# Altium PCB playA.PcbDoc
Units mm, origin at the board's own origin, x right, y up, seen from the top; angles counter-clockwise.
Board outline 50 x 50 mm, 2 copper layers (Top Layer, Bottom Layer); 7 components, 4 nets, 7 pads, 0 vias.
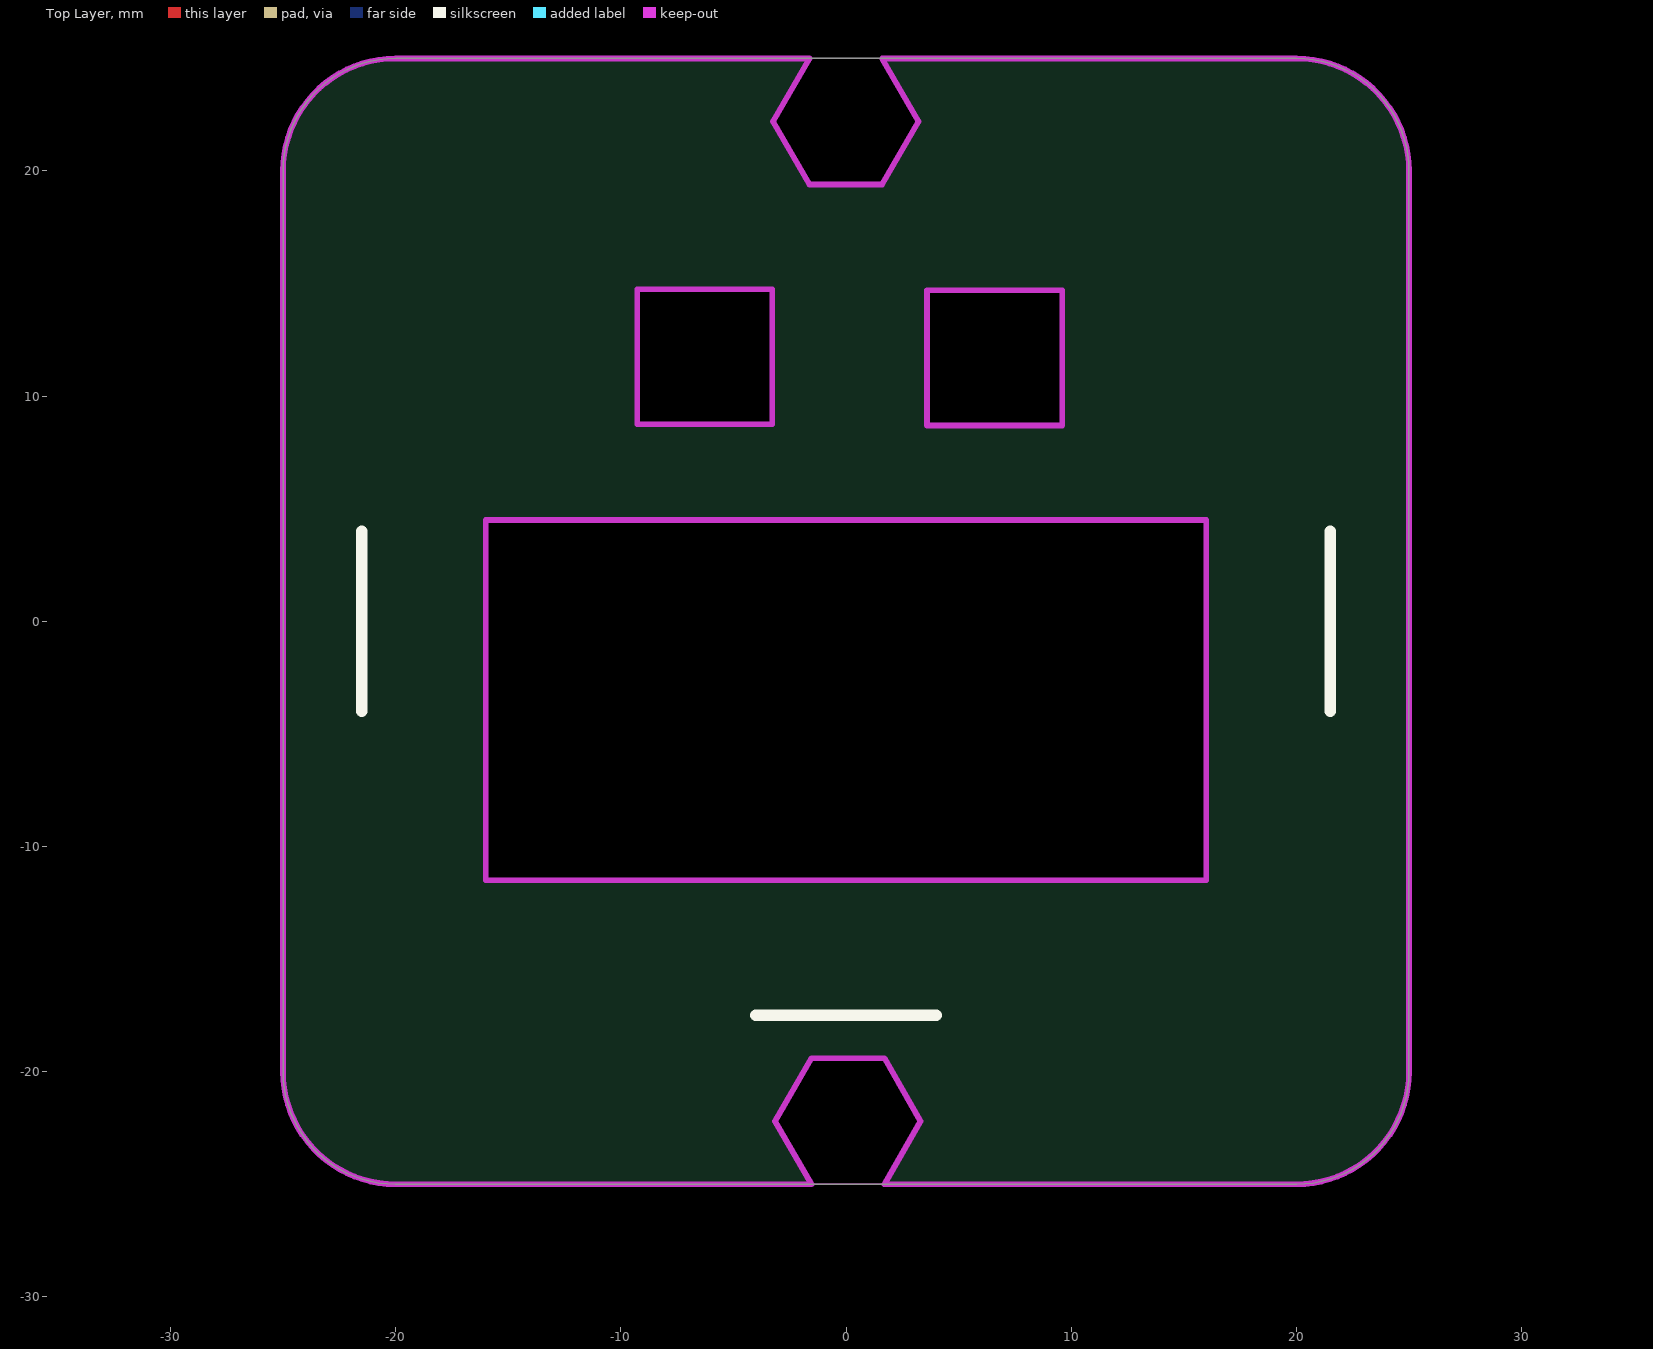
[diagram p0: Top Layer view]
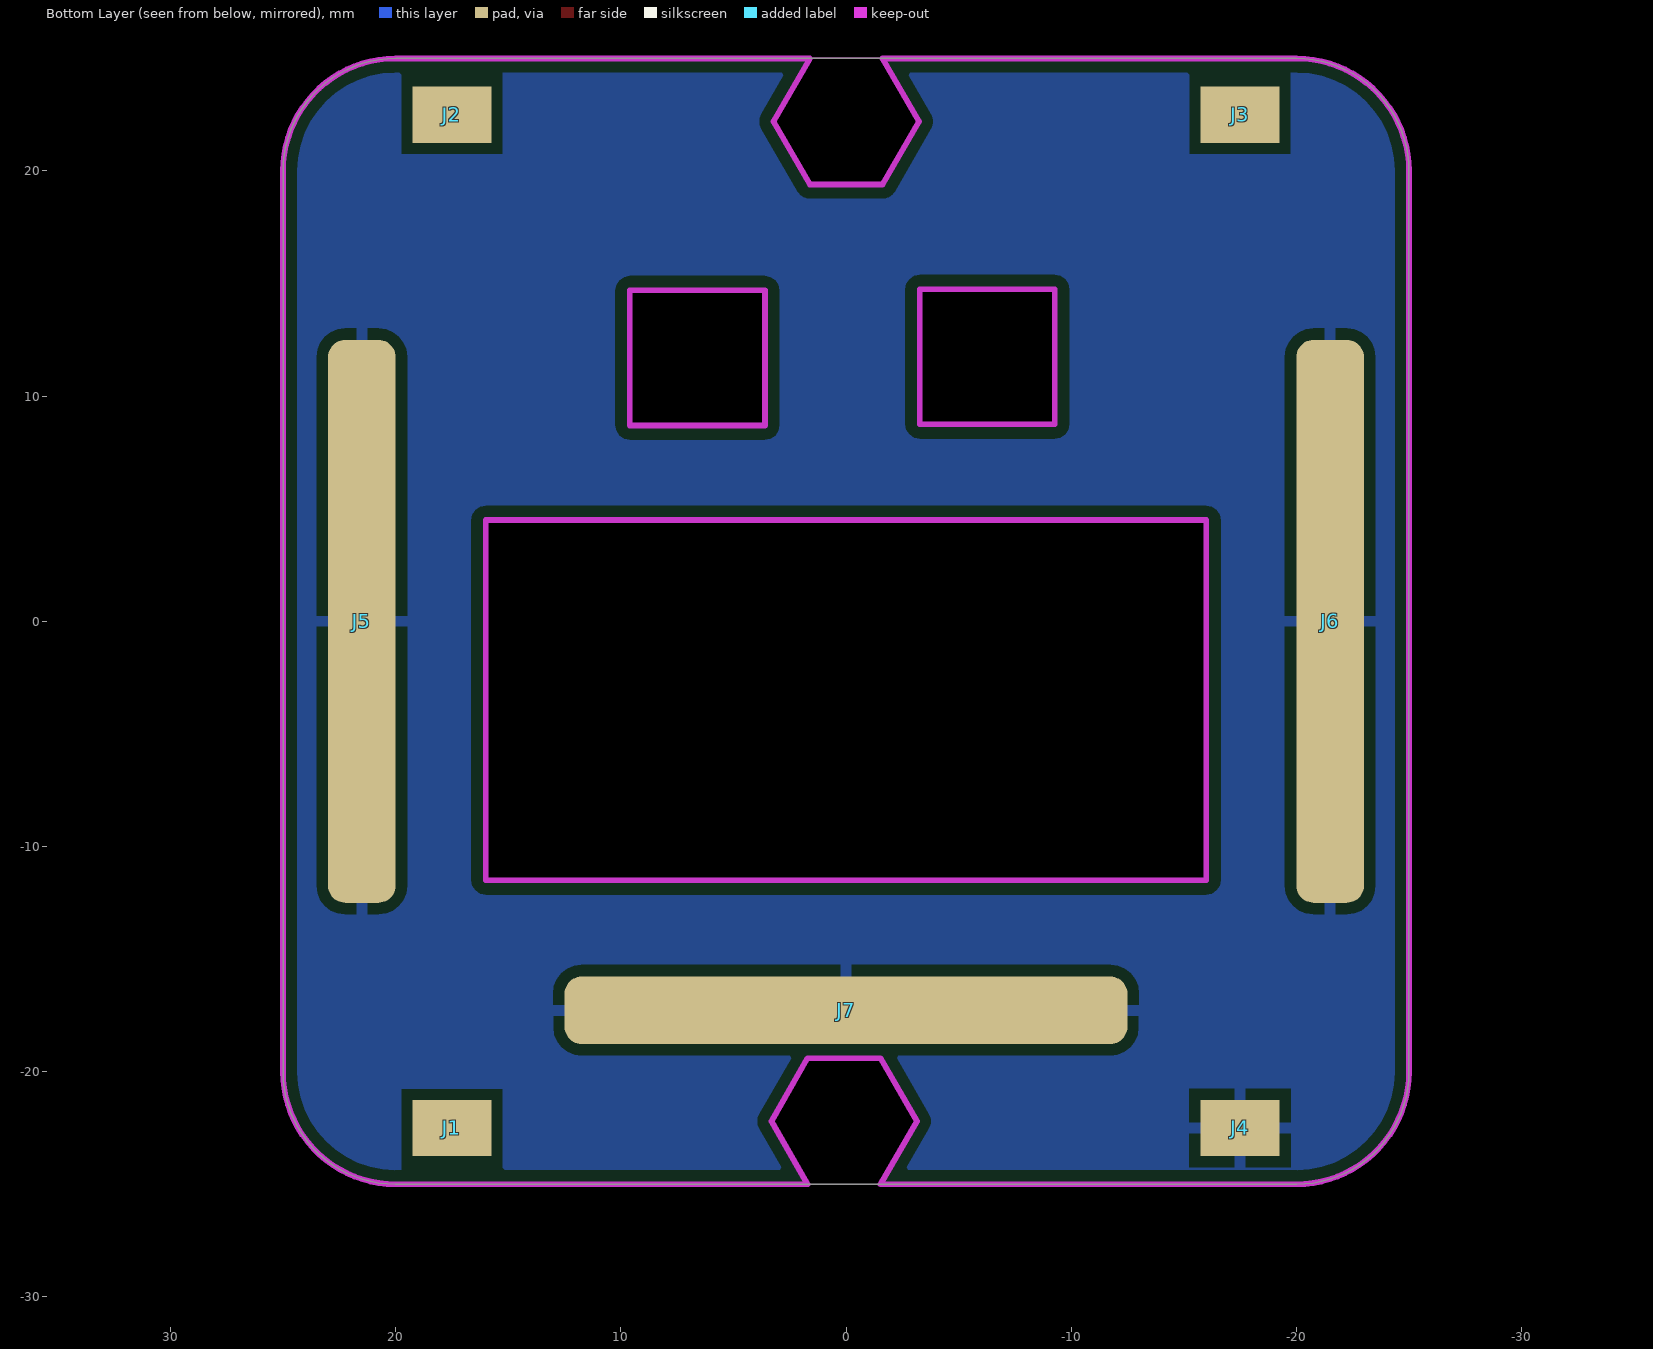
[diagram p1: Bottom Layer view, seen from below]

## Layer stack, top to bottom
Top Layer: signal copper 0.0356
Dielectric: dielectric 0.32, FR-4, Dk 4.8
Bottom Layer: signal copper 0.0356

## Board outline
-25,-20 -25,20 cw(c-20,20) -20,25 20,25 cw(c20,20) 25,20 25,-20 cw(c20,-20) 20,-25 -20,-25 cw(c-20,-20)
cut-out: -1.625,19.4 -3.242,22.2 -1.625,25 1.608,25 3.225,22.2 1.608,19.4
cut-out: -1.533,-25 -3.15,-22.2 -1.533,-19.4 1.7,-19.4 3.317,-22.2 1.7,-25
cut-out: -16,-11.5 -16,4.5 16,4.5 16,-11.5
cut-out: -9.275,8.75 -9.275,14.75 -3.275,14.75 -3.275,8.75
cut-out: 3.6,8.7 3.6,14.7 9.6,14.7 9.6,8.7

## Design rules (kind name [scope] priority, off if disabled: settings)
Clearance [All] p1: gap=0.5
PolygonConnect [All] p1: connectstyle=Relief reliefconductorwidth=0.5 reliefentries=4 polygonreliefangle="90 Angle"
RoutingVias [All] p1: holewidth=0.711 width=1.27 viastyle="Through Hole" minholewidth=0.711 minwidth=1.27 maxholewidth=0.711 maxwidth=1.27
SilkscreenOverComponentPads [All] p1: minsilkscreentomaskgap=0.254
SolderMaskExpansion [All] p1: expansion=0.102
TestPointUsage [All] p1: valid=0 allowmultiple=FALSE
Testpoint [All] p1: side=15 testpointundercomponent=TRUE minsize=1.016 maxsize=2.54 preferedsize=1.524 minholesize=0 maxholesize=1.016 preferedholesize=0.813 testpointgrid=0.025 style=1023 order=0-112345678
Width [All] p1: maxlimit=0.254 minlimit=0.254 preferedwidth=0.254
23 further rules are at their usual default settings.

## Components (designator, comment, footprint, x,y, rotation, side; value= is the part's Value field where it differs from the comment)
J1 "PAD" LINK_PAD#1 17.78,-24.384 r180 bottom
J2 "PAD" LINK_PAD#2 19.812,21.844 r180 bottom
J3 "PAD" LINK_PAD#3 -17.272,22.352 r180 bottom
J4 "PAD" LINK_PAD#4 -19.304,-21.336 r180 bottom
J5 "PAD" Button_Pad#1 -20.32,-0.508 r90 bottom
J6 "PAD" Button_Pad#2 -20.828,1.524 r90 bottom
J7 "PAD" Button_Pad#3 -0.508,-17.272 r180 bottom

## Footprints (in the part's own frame and the unit in brackets; to place one, negate y for a bottom-side part, rotate by r counter-clockwise, add the part's x,y. Pads: shape width x height; smd on the part's side, far side on the other; paste and mask are expansions set on the pad)
Button_Pad#1 [mm]
  rrect50% 25x3 smd: 1(0.508,41.82)
Button_Pad#2 [mm]
  rrect50% 25x3 smd: 1(-1.524,-0.672)
Button_Pad#3 [mm]
  rrect50% 25x3 smd: 1(-0.508,0)
LINK_PAD#1 [mm]
  rect 3.5x2.5 smd: 1(0.28,1.884)
LINK_PAD#2 [mm]
  rect 3.5x2.5 smd: 1(2.312,0.656)
LINK_PAD#3 [mm]
  rect 3.5x2.5 smd: 1(0.228,0.148)
LINK_PAD#4 [mm]
  rect 3.5x2.5 smd: 1(-1.804,-1.164)

## Part data
J1 J2 J3 J4 J5 J6 J7: library part Socket, "Socket"

## Nets (pads, with @x,y where several pads share a name; then routed paths per layer and width w, separated by ;. In a path a pad name is that pad's centre, name@x,y a point inside that pad or via, vN(x,y) a via of type N, cw(c..) or ccw(c..) an arc to the next point about the centre after c; other vN are vias at no path point)
BUTTON_DOWN: J3.1
BUTTON_LEFT: J1.1
BUTTON_RIGHT: J2.1
GND: J4.1 J5.1 J6.1 J7.1

## Polygon pours and split planes (outlines as drawn)
GND on Bottom Layer "Top Layer-No Net" (solid, remove dead copper): -25.025,25 25,25 25,-25 25.025,-25.025 -24.975,-25.025

## Keep-outs
Keep-Out Layer:
  lines w0.254: -25,-20 ccw(c-20,-20) -20,-25 -1.533,-25 -3.15,-22.2 -1.533,-19.4 1.7,-19.4 3.317,-22.2 1.7,-25 20,-25 ccw(c20,-20) 25,-20 25,20 ccw(c20,20) 20,25 1.608,25 3.225,22.2 1.608,19.4 -1.625,19.4 -3.242,22.2 -1.625,25 -20,25 ccw(c-20,20) -25,20 -25,-20 ; -16,-11.5 16,-11.5 16,4.5 -16,4.5 -16,-11.5 ; -9.275,8.75 -3.275,8.75 -3.275,14.75 -9.275,14.75 -9.275,8.75 ; 3.6,8.7 9.6,8.7 9.6,14.7 3.6,14.7 3.6,8.7

## Silkscreen, mask and mechanical layers (free items; w line width, h text height)
Top Overlay:
  lines w0.508: -21.5,-4 -21.5,4 ; -4,-17.5 4,-17.5 ; 21.5,-4 21.5,4